# Altium PCB EncoderFin.PcbDoc
Units mil, origin at the board's own origin, x right, y up, seen from the top; angles counter-clockwise.
Board outline 1410 x 4085 mil, 2 copper layers (Top Layer, Bottom Layer); 80 components, 78 nets, 350 pads, 83 vias.
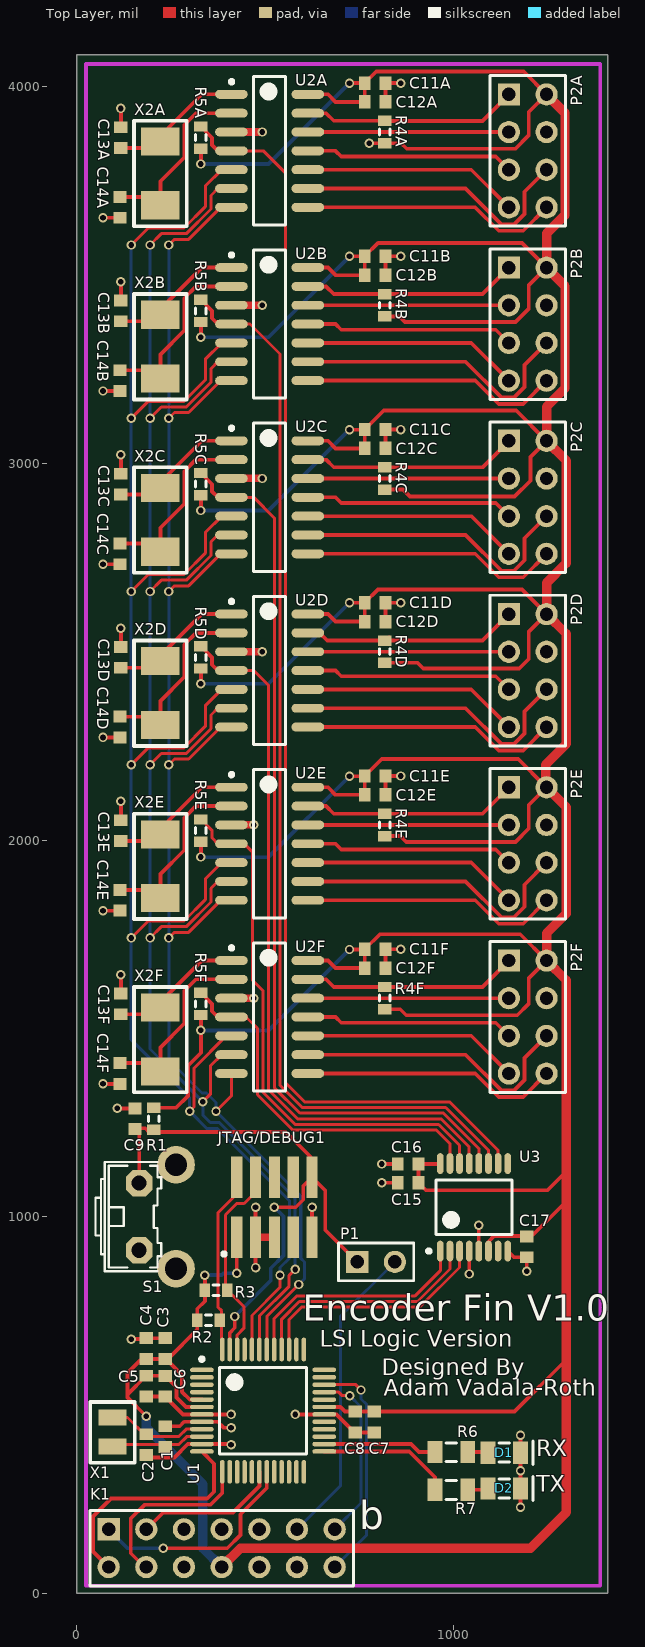
[diagram p0: Top Layer view]
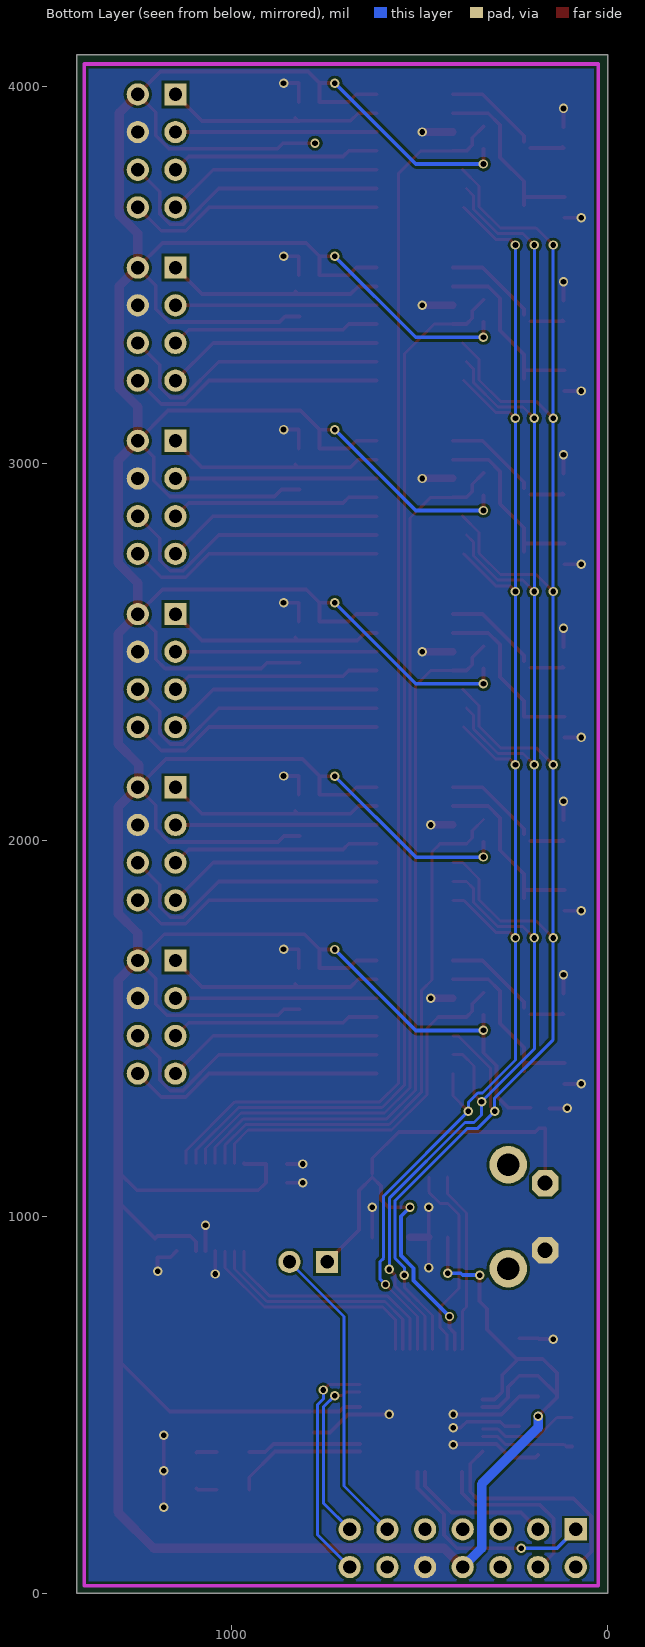
[diagram p1: Bottom Layer view, seen from below]

## Layer stack, top to bottom
Top Solder: solder mask 0.4, Solder Resist, Dk 3.5
Top Layer: signal copper 1.4
Dielectric 1: dielectric 12.6, FR-4, Dk 4.8
Bottom Layer: signal copper 1.4
Bottom Solder: solder mask 0.4, Solder Resist, Dk 3.5

## Board outline
0,0 0,4085 1410,4085 1410,0

## Design rules (kind name [scope] priority, off if disabled: settings)
Clearance [All] p1: gap=7
ComponentClearance [All] p1: gap=0 collisioncheckmode=3 verticalgap=10 showdistances=FALSE
FanoutControl Fanout_SOIC [(InComponent('U8') AND InComponent('U7'))] p3: bgadir=Out bgaviamode=Centered fanoutstyle=Staggered fanoutdirection=Alternating viagrid=1 // Fanout_SOIC (Default Rule)
FanoutControl Fanout_Small [All] p4: bgadir=Out bgaviamode=Centered fanoutstyle=Auto fanoutdirection=Alternating viagrid=1 // Fanout_Small (Default Rule)
HoleSize [All] p1: absolutevalues=TRUE maxlimit=120 minlimit=1 maxpercent=80.000 minpercent=20.000
MinimumSolderMaskSliver [All] p1 off: minsoldermaskwidth=10
PlaneConnect [All] p1: planeconnectstyle=Direct reliefexpansion=20 reliefentries=4 reliefconductorwidth=10 reliefairgap=10
PolygonConnect [All] p1: connectstyle=Direct reliefconductorwidth=45 reliefentries=4 polygonreliefangle="90 Angle" airgapwidth=10
RoutingVias [All] p1: holewidth=15 width=25 viastyle="Through Hole" minholewidth=15 minwidth=25 maxholewidth=28 maxwidth=50
SilkToSilkClearance [All] p1 off: silktosilkclearance=10
SilkToSolderMaskClearance SilkscreenOverComponentPads [IsPad] p1 off: minsilkscreentomaskgap=10 clearancetoexposedcopper=TRUE
SolderMaskExpansion [All] p1: expansion=4
UnpouredPolygon [All] p1: allowunpoured=FALSE
Width [All] p1: maxlimit=50 minlimit=7 preferedwidth=8
21 further rules are at their usual default settings.

## Classes and differential pairs
net class Q_SS[1..6]: Q_SS1 Q_SS2 Q_SS3 Q_SS4 Q_SS5 Q_SS6
channel class "Encoder Fin - Quadrature  Channel": U_EncoderFin-QuadratureChannel1 U_EncoderFin-QuadratureChannel2 U_EncoderFin-QuadratureChannel3 U_EncoderFin-QuadratureChannel4 U_EncoderFin-QuadratureChannel5 U_EncoderFin-QuadratureChannel6
component class U_EncoderFin-QuadratureChannel6: C11F C12F C13F C14F P2F R4F R5F U2F X2F
component class U_EncoderFin-QuadratureChannel5: C11E C12E C13E C14E P2E R4E R5E U2E X2E
component class U_EncoderFin-QuadratureChannel4: C11D C12D C13D C14D P2D R4D R5D U2D X2D
component class U_EncoderFin-QuadratureChannel3: C11C C12C C13C C14C P2C R4C R5C U2C X2C
component class U_EncoderFin-QuadratureChannel2: C11B C12B C13B C14B P2B R4B R5B U2B X2B
component class U_EncoderFin-QuadratureChannel1: C11A C12A C13A C14A P2A R4A R5A U2A X2A
component class "U_Encoder Fin - MCU": C1 C2 C3 C4 C5 C6 C7 C8 C9 D1 D2 JTAG/DEBUG1 P1 R1 R2 R3 R6 R7 S1 U1 X1
component class "U_Encoder Fin - Kinen Connector": K1
component class "Encoder Fin - System": C15 C16 C17 U3

## Components (designator, comment, footprint, x,y, rotation, side; value= is the part's Value field where it differs from the comment)
C1 "0603" 1608[0603] 235.29,416.1 r90 top
C2 "0603" 1608[0603] 185,395 r270 top
C3 "0603" 1608[0603] 235,650 r270 top
C4 "0603" 1608[0603] 185,650 r270 top
C5 "0603" 1608[0603] 185,550.08 r90 top
C6 "0603" 1608[0603] 235,550 r90 top
C7 "0603" 1608[0603] 790,455 r270 top
C8 "0603" 1608[0603] 740,455 r270 top
C9 "Cap Semi" 1608[0603] 155,1260 r270 top
C11A "0603" 1608[0603] 792.56,4009.41 r180 top (schematic designator C11)
C11B "0603" 1608[0603] 792.56,3549.53 r180 top (schematic designator C11)
C11C "0603" 1608[0603] 792.56,3089.65 r180 top (schematic designator C11)
C11D "0603" 1608[0603] 792.56,2629.77 r180 top (schematic designator C11)
C11E "0603" 1608[0603] 792.56,2169.88 r180 top (schematic designator C11)
C11F "0603" 1608[0603] 792.56,1710 r180 top (schematic designator C11)
C12A "0603" 1608[0603] 792.56,3959.41 r180 top (schematic designator C12)
C12B "0603" 1608[0603] 792.56,3499.53 r180 top (schematic designator C12)
C12C "0603" 1608[0603] 792.56,3039.65 r180 top (schematic designator C12)
C12D "0603" 1608[0603] 792.56,2579.77 r180 top (schematic designator C12)
C12E "0603" 1608[0603] 792.56,2119.88 r180 top (schematic designator C12)
C12F "0603" 1608[0603] 792.56,1660 r180 top (schematic designator C12)
C13A "0603" 1608[0603] 117.56,3864.53 r270 top (schematic designator C13)
C13B "0603" 1608[0603] 117.56,3404.65 r270 top (schematic designator C13)
C13C "0603" 1608[0603] 117.56,2944.77 r270 top (schematic designator C13)
C13D "0603" 1608[0603] 117.56,2484.88 r270 top (schematic designator C13)
C13E "0603" 1608[0603] 117.56,2025 r270 top (schematic designator C13)
C13F "0603" 1608[0603] 117.56,1565.12 r270 top (schematic designator C13)
C14A "0603" 1608[0603] 115.12,3679.53 r90 top (schematic designator C14)
C14B "0603" 1608[0603] 115.12,3219.65 r90 top (schematic designator C14)
C14C "0603" 1608[0603] 115.12,2759.77 r90 top (schematic designator C14)
C14D "0603" 1608[0603] 115.12,2299.88 r90 top (schematic designator C14)
C14E "0603" 1608[0603] 115.12,1840 r90 top (schematic designator C14)
C14F "0603" 1608[0603] 115.12,1380.12 r90 top (schematic designator C14)
C15 "0603" 1608[0603] 880,1090 r0 top
C16 "0603" 1608[0603] 880,1140 r0 top
C17 "0603" 1608[0603] 1195,920 r90 top
D1 "LED1" "SM 0805 polarized" 1215,330 r180 top
D2 "LED1" "SM 0805 polarized" 1215,235 r180 top
JTAG/DEBUG1 "ARM Cortex JTAG-DEBUG" FTSH-105-XX-X-DV 525,1025 r180 top
K1 "Smart Kinen" "Kinen Fin - Smart Device" 685,70 r90 top
P1 "Header 2" HDR1X2 745,880 r0 top
P2A "Header 4X2" HDR2X4 1147.56,3979.41 r270 top (schematic designator P2)
P2B "Header 4X2" HDR2X4 1147.56,3519.53 r270 top (schematic designator P2)
P2C "Header 4X2" HDR2X4 1147.56,3059.65 r270 top (schematic designator P2)
P2D "Header 4X2" HDR2X4 1147.56,2599.77 r270 top (schematic designator P2)
P2E "Header 4X2" HDR2X4 1147.56,2139.88 r270 top (schematic designator P2)
P2F "Header 4X2" HDR2X4 1147.56,1680 r270 top (schematic designator P2)
R1 "Res3" J1-0603 205,1260 r90 top
R2 "0603" J1-0603 350,725 r0 top
R3 "0603" J1-0603 370,805 r0 top
R4A "0603" J1-0603 817.56,3879.53 r270 top (schematic designator R4)
R4B "0603" J1-0603 817.56,3419.65 r270 top (schematic designator R4)
R4C "0603" J1-0603 817.56,2959.77 r270 top (schematic designator R4)
R4D "0603" J1-0603 817.56,2499.88 r270 top (schematic designator R4)
R4E "0603" J1-0603 817.56,2040 r270 top (schematic designator R4)
R4F "0603" J1-0603 817.56,1580.12 r270 top (schematic designator R4)
R5A "0603" J1-0603 330,3864.53 r90 top (schematic designator R5)
R5B "0603" J1-0603 330,3404.65 r90 top (schematic designator R5)
R5C "0603" J1-0603 330,2944.77 r90 top (schematic designator R5)
R5D "0603" J1-0603 330,2484.88 r90 top (schematic designator R5)
R5E "0603" J1-0603 330,2025 r90 top (schematic designator R5)
R5F "0603" J1-0603 330,1565.12 r90 top (schematic designator R5)
R6 "0805" "SM 0805 - gap trimmed" 995,375 r0 top
R7 "0805" "SM 0805 - gap trimmed" 995,275 r0 top
S1 "1571610-2" B3F-31XX 215,1000 r270 top
U1 "MKL05Z32VLF4" MKL05Z32VLF4 495,485 r0 top
U2A "LS7366R" SOIC127P630X175-14N 512.44,3829.53 r0 top (schematic designator U2)
U2B "LS7366R" SOIC127P630X175-14N 512.44,3369.65 r0 top (schematic designator U2)
U2C "LS7366R" SOIC127P630X175-14N 512.44,2909.77 r0 top (schematic designator U2)
U2D "LS7366R" SOIC127P630X175-14N 512.44,2449.88 r0 top (schematic designator U2)
U2E "LS7366R" SOIC127P630X175-14N 512.44,1990 r0 top (schematic designator U2)
U2F "LS7366R" SOIC127P630X175-14N 512.44,1530.12 r0 top (schematic designator U2)
U3 "74LV138" TSOP65P640X120-16N-74IC 1055,1025 r90 top
X1 "ABS07-32.768KHZ-T" ABS07-32.768KHZ-T 95,390 r90 top
X2A "XTAL" ABM7-10.0000MHZ-D2Y-T 222.56,3854.53 r270 top (schematic designator X2)
X2B "XTAL" ABM7-10.0000MHZ-D2Y-T 222.56,3394.65 r270 top (schematic designator X2)
X2C "XTAL" ABM7-10.0000MHZ-D2Y-T 222.56,2934.77 r270 top (schematic designator X2)
X2D "XTAL" ABM7-10.0000MHZ-D2Y-T 222.56,2474.88 r270 top (schematic designator X2)
X2E "XTAL" ABM7-10.0000MHZ-D2Y-T 222.56,2015 r270 top (schematic designator X2)
X2F "XTAL" ABM7-10.0000MHZ-D2Y-T 222.56,1555.12 r270 top (schematic designator X2)

## Footprints (in the part's own frame and the unit in brackets; to place one, negate y for a bottom-side part, rotate by r counter-clockwise, add the part's x,y. Pads: shape width x height; smd on the part's side, far side on the other; paste and mask are expansions set on the pad)
1608[0603] [mm] "Chip Capacitor, Body 1.6x0.8mm, IPC High Density"
  rect 0.8x0.9 smd: 1(-0.7,0) 2(0.7,0)
  body extent -0.87,-0.48 0.87,0.48, height 1.3
ABM7-10.0000MHZ-D2Y-T [mm] "Abracom 10MHZ SMD Crystal Oscillator"
  rect 1.9x2.6 smd: 1(0,0) 2(4.3,0)
  silkscreen extent -1.4,-1.78 5.71,1.78
ABS07-32.768KHZ-T [mm] "ABS07-32.768KHZ-T Crystal Oscillator"
  rect 1.1x1.9 smd: 1(0,0) 2(1.95,0)
  silkscreen extent -1.1,-1.5 3,1.5
B3F-31XX [mil]
  oct 70x70 hole 40: 1(-89,-49) 2(89,-49)
  round 100 hole 59: 3(-138,49) 4(138,49)
  silkscreen extent -145,-165 145,10, body extent -165,-200 165,109, height 303
FTSH-105-XX-X-DV [mm] "1.27mm pitch, 10 pin, terminal strip; vertical, SMT"
  rect 0.75x2.8 smd mask+0: 1(2.54,2.03) 2(2.54,-2.03) 3(1.27,2.03) 4(1.27,-2.03) 5(0,2.03) 6(0,-2.03) 7(-1.27,2.03) 8(-1.27,-2.03) 9(-2.54,2.03) 10(-2.54,-2.03)
  silkscreen extent 3.27,3.03 3.52,3.27
HDR1X2 [mm] "Connector; Header; 2 Position"
  rect 1.5x1.5 hole 0.9: 1(0,0)
  round 1.5 hole 0.9: 2(2.54,0)
  silkscreen extent -1.27,-1.27 3.81,1.27
HDR2X4 [mm] "Connector; Header; 4x2 Position"
  rect 1.5x1.5 hole 0.9: 1(0,0)
  round 1.5 hole 0.9: 2(0,2.54) 3(2.54,0) 4(2.54,2.54) 5(5.08,0) 6(5.08,2.54) 7(7.62,0) 8(7.62,2.54)
  silkscreen extent -1.27,-1.27 8.89,3.81
J1-0603 [mm] "Chip Resistor, Body 1.6x0.8mm, IPC High Density"
  rect 0.7x0.9 smd: 1(-0.75,0) 2(0.75,0)
  silkscreen extent -0.2,-0.35 0.2,0.35, body extent -0.85,-0.48 0.85,0.48, height 0.9
"Kinen Fin - Smart Device" [mm]
  rect 1.5x1.5 hole 0.9: 1(2.54,15.24)
  round 1.5 hole 0.9: 2(0,15.24) 3(2.54,12.7) 4(0,12.7) 5(2.54,10.16) 6(0,10.16) 7(2.54,7.62) 8(0,7.62) 9(2.54,5.08) 10(0,5.08) 11(2.54,2.54) 12(0,2.54) 13(2.54,0) 14(0,0)
  silkscreen extent -1.27,-1.27 3.81,16.51
MKL05Z32VLF4 [mm] "TSQFP, 48-Leads, Body 7.00x7.00mm, Pitch 0.50mm, IPC Medium Density"
  oval 1.6x0.3 smd: 1(-4.125,2.75) 2(-4.125,2.25) 3(-4.125,1.75) 4(-4.125,1.25) 5(-4.125,0.75) 6(-4.125,0.25) 7(-4.125,-0.25) 8(-4.125,-0.75) 9(-4.125,-1.25) 10(-4.125,-1.75) 11(-4.125,-2.25) 12(-4.125,-2.75) 25(4.125,-2.75) 26(4.125,-2.25) 27(4.125,-1.75) 28(4.125,-1.25) 29(4.125,-0.75) 30(4.125,-0.25) 31(4.125,0.25) 32(4.125,0.75) 33(4.125,1.25) 34(4.125,1.75) 35(4.125,2.25) 36(4.125,2.75)
  oval 0.3x1.6 smd: 13(-2.75,-4.125) 14(-2.25,-4.125) 15(-1.75,-4.125) 16(-1.25,-4.125) 17(-0.75,-4.125) 18(-0.25,-4.125) 19(0.25,-4.125) 20(0.75,-4.125) 21(1.25,-4.125) 22(1.75,-4.125) 23(2.25,-4.125) 24(2.75,-4.125) 37(2.75,4.125) 38(2.25,4.125) 39(1.75,4.125) 40(1.25,4.125) 41(0.75,4.125) 42(0.25,4.125) 43(-0.25,4.125) 44(-0.75,4.125) 45(-1.25,4.125) 46(-1.75,4.125) 47(-2.25,4.125) 48(-2.75,4.125)
  silkscreen extent -4.25,-2.93 2.93,3.6, body extent -3.5,-3.5 3.5,3.5, height 1.6
"SM 0805 - gap trimmed" [mm]
  rect 1x1.5 smd: 1(-1.1,0) 2(1.1,0)
  silkscreen extent -0.36,-0.64 0.35,0.63
"SM 0805 polarized" [mm]
  rect 1x1.5 smd: 1(0.93,-1.105) 2(3.13,-1.105)
  silkscreen extent 0.1,-1.9 2.38,-0.3
SOIC127P630X175-14N [mm] "SOIC, 14-Leads, Body 10.0x4.0mm (max), Pitch 1.27mm, IPC Medium Density"
  oval 2.2x0.6 smd: 1(-2.575,3.81) 2(-2.575,2.54) 3(-2.575,1.27) 4(-2.575,0) 5(-2.575,-1.27) 6(-2.575,-2.54) 7(-2.575,-3.81) 8(2.575,-3.81) 9(2.575,-2.54) 10(2.575,-1.27) 11(2.575,0) 12(2.575,1.27) 13(2.575,2.54) 14(2.575,3.81)
  silkscreen extent -2.7,-5 1.07,5, body extent -2,-5 2,5, height 1.75
TSOP65P640X120-16N-74IC [mm] "TSOP, 16-Leads, Body 5.00x4.40mm, Pitch 0.65mm, IPC Medium Density"
  oval 1.4x0.45 smd: 1(-2.95,2.275) 2(-2.95,1.625) 3(-2.95,0.975) 4(-2.95,0.325) 5(-2.95,-0.325) 6(-2.95,-0.975) 7(-2.95,-1.625) 8(-2.95,-2.275) 9(2.95,-2.275) 10(2.95,-1.625) 11(2.95,-0.975) 12(2.95,-0.325) 13(2.95,0.325) 14(2.95,0.975) 15(2.95,1.625) 16(2.95,2.275)
  silkscreen extent -3.07,-2.55 1.85,3.17, body extent -2.25,-2.55 2.25,2.55, height 1.2

## Part data
C1 C2 C3 C4 C5 C6 C7 C8 C11A C11B C11C C11D C11E C11F C12A C12B C12C C12D C12E C12F C13A C13B C13C C13D C13E C13F C14A C14B C14C C14D C14E C14F C15 C16 C17: library part "Cap Semi", "Capacitor (Semiconductor SIM Model)"
C9: "Capacitor (Semiconductor SIM Model)"
D1 D2: "Typical RED GaAs LED"
JTAG/DEBUG1: library part "ARM Cortex JTAG-DEBUG Header"
K1: library part "Kinen Device NEW Smart"
P1: "Header, 2-Pin"
P2A P2B P2C P2D P2E P2F: "Header, 4-Pin, Dual row"
R1: "Resistor"
R2 R3 R4A R4B R4C R4D R4E R4F R5A R5B R5C R5D R5E R5F R6 R7: library part Res3, "Resistor"
S1: library part 1571610-2_1, "SWTCH Momentary Washable"
U1: "ARM Cortex M0+"
U3: library part "74LV138 - 3 to 8 Decoder NXP 3.3v/5v", "74LV138 - 3 to 8 Decoder NXP 3.3v/5v"
X1: "ABS07-32.768KHZ-T RTC Crystal Oscillator"
X2A X2B X2C X2D X2E X2F: "Crystal Oscillator"

## Via types
v1: diameter 25, hole 15, Top Layer to Bottom Layer, 83 vias

## Nets (pads, with @x,y where several pads share a name; then routed paths per layer and width w, separated by ;. In a path a pad name is that pad's centre, name@x,y a point inside that pad or via, vN(x,y) a via of type N, cw(c..) or ccw(c..) an arc to the next point about the centre after c; other vN are vias at no path point)
3.3VCC: C3.2 C4.2 C5.2 C6.2 C7.1 C8.1 C11A.2 C11B.2 C11C.2 C11D.2 C11E.2 C11F.2 C12A.2 C12B.2 C12C.2 C12D.2 C12E.2 C12F.2 C15.2 C16.2 C17.2 JTAG/DEBUG1.1 K1.8 P2A.2 P2B.2 P2C.2 P2D.2 P2E.2 P2F.2 R1.2 R2.1 R3.1 R4A.2 R4B.2 R4C.2 R4D.2 R4E.2 R4F.2 R5A.1 R5B.1 R5C.1 R5D.1 R5E.1 R5F.1 U1.5 U1.6 U1.31 U2A.14 U2B.14 U2C.14 U2D.14 U2E.14 U2F.14 U3.6 U3.16 | length 19440.7
  Top Layer w10: v1(185,470) 135,520 135,527.64 ; R1.2 264.53,1289.53 295.5,1320.5 295.5,1400.94 330,1435.44 v1(330,1495.12) R5F.1 ; v1(330,1955) R5E.1 ; v1(330,2414.88) R5D.1 ; v1(330,2874.77) R5C.1 ; v1(330,3334.65) R5B.1 ; v1(330,3794.53) R5A.1 ; U1.6 290.16,494.84 265,520 265,547.56 C6.2 234.92,577.64 C5.2 135,527.64 ; U1.5 300.47,514.53 280,535 280,580 C3.2@237.56,622.44 ; v1(340,845) 340.47,844.53 R3.1 340.47,775.47 320.47,755.47 320.47,700.47 242.44,622.44 C3.2@237.56,622.44 ; v1(425,850) JTAG/DEBUG1.1 ; U2F.14 667.44,1680.12 687.56,1660 C12F.2 C11F.2 805,1750 1177.56,1750 P2F.2 1200,1632.44 1200,1565 1170,1535 875,1535 859.41,1550.59 R4F.2 ; U2E.14 667.44,2140 687.56,2119.88 C12E.2 C11E.2 810.12,2215 1172.44,2215 1245,2142.44 P2E.2 1200,2092.32 1200,2030 1165,1995 875,1995 859.53,2010.47 R4E.2 ; U2D.14 667.44,2599.88 687.56,2579.77 C12D.2 C11D.2 ; U2C.14 667.44,3059.77 687.56,3039.65 C12C.2 C11C.2 815.35,3140 1167.21,3140 P2C.2 1205,3017.09 1205,2953.97 1162.68,2911.65 885,2911.65 866.41,2930.24 R4C.2 ; U2B.14 667.44,3519.65 687.56,3499.53 C12B.2 C11B.2 800.47,3585 1182.09,3585 P2B.2 1200,3471.97 1200,3410 1165,3375 871.53,3375 856.41,3390.12 R4B.2 ; U2A.14 667.44,3979.53 687.56,3959.41 C12A.2 C11A.2 ; U1.31 700.16,494.84 712.44,482.56 C8.1 C7.1@780,482.56 ; v1(724.53,1709.41) C11F.2@765,1709.41 ; v1(724.53,2169.41) C11E.2@765,2169.41 ; v1(724.53,2629.77) C11D.2 ; v1(724.53,3089.41) C11C.2@765,3089.41 ; v1(724.53,3549.41) C11B.2@765,3549.41 ; v1(724.53,4009.41) C11A.2 ; v1(777.09,3850) R4A.2 861.41,3850 876.41,3835 1165,3835 1200,3870 1200,3931.85 P2A.2 1186.97,4040 795.59,4040 C11A.2 ; C7.1 1162.56,482.56 1300,620 ; R4D.2 904.65,2470.36 920,2455 1175,2455 1200,2480 1200,2552.21 P2D.2 1182.32,2665 800.24,2665 C11D.2 ; U3.16 964.29,1140 C16.2 C15.2 927.56,1070 1250,1070 1300,1120 ; U3.6 1093.39,933.39 1108.42,948.42 1195,948.42 C17.2 ; C17.2@1201.71,941.71 1300,1040 ; 135,527.64 135,585 172.44,622.44 C4.2 C3.2 C3.2@237.56,622.44
  Top Layer w25: K1.8 435,120 1205,120 1300,215 1300,620 1300,1040 1300,1120 1300,1627.56 P2F.2 1247.56,1752.44 1300,1804.88 1300,2087.44 P2E.2 ; P2E.2@1245,2142.44 1245,2200 1300,2255 1300,2547.32 P2D.2 1247.56,2682.56 1300,2735 1300,3007.21 P2C.2 1247.56,3150.19 1296.59,3199.22 1296.59,3470.5 P2B.2 1247.56,3610.08 1296.59,3659.1 1296.59,3930.38 P2A.2
  Bottom Layer w10: v1@330,1494.53 509.65,1494.53 v1(724.53,1709.41) ; v1@330,1954.53 509.65,1954.53 v1(724.53,2169.41) ; v1(330,2414.88) 509.65,2414.88 v1(724.53,2629.77) ; v1@330,2874.53 509.65,2874.53 v1(724.53,3089.41) ; v1@330,3334.53 509.65,3334.53 v1(724.53,3549.41) ; v1(330,3794.53) 509.65,3794.53 v1(724.53,4009.41) ; v1(340,845) 385,845 390,850 v1(425,850)
  Bottom Layer w25: v1(185,470) 185,440 335,290 335,120 K1.8
B_DECO: U1.40 U3.2 | length 630.3
  Top Layer w8: U1.40 544.21,728 591.21,775 905,775 991.02,861.02 U3.2
C_DECO: U1.39 U3.3 | length 632.8
  Top Layer w8: U1.39 563.9,726.47 597.43,760 911.21,760 1016.61,865.4 U3.3
EXTAL0: C2.1 U1.9 X1.2 | length 266.1
  Top Layer w8: X1.2 135.14,466.77 185,416.91 271.91,416.91 290.79,435.79 U1.9
GND: C1.2 C2.2 C3.1 C4.1 C5.1 C6.1 C7.2 C8.2 C9.1 C11A.1 C11B.1 C11C.1 C11D.1 C11E.1 C11F.1 C12A.1 C12B.1 C12C.1 C12D.1 C12E.1 C12F.1 C13A.1 C13B.1 C13C.1 C13D.1 C13E.1 C13F.1 C14A.1 C14B.1 C14C.1 C14D.1 C14E.1 C14F.1 C15.1 C16.1 C17.1 D1.1 D2.1 JTAG/DEBUG1.3 JTAG/DEBUG1.5 JTAG/DEBUG1.9 K1.10 P2A.4 P2B.4 P2C.4 P2D.4 P2E.4 P2F.4 S1.2 U1.7 U1.8 U1.11 U1.30 U2A.3 U2B.3 U2C.3 U2D.3 U2E.3 U2F.3 U3.4 U3.5 U3.8 | length 3379.7
  Top Layer w10: v1(70,1352.56) C14F.1 ; v1(70,1812.44) C14E.1 ; v1(70,2272.32) C14D.1 ; v1(70,2732.21) C14C.1 ; v1(70,3192.09) C14B.1 ; v1(70,3651.97) C14A.1 ; v1(107.44,1287.56) C9.1 ; C13F.1 v1(117.56,1642.68) ; C13E.1 v1(117.56,2102.56) ; C13D.1 v1(117.56,2562.44) ; C13C.1 v1(117.56,3022.32) ; C13B.1 v1(117.56,3482.21) ; C13A.1 v1(117.56,3942.09) ; v1(145,675) 182.44,675 C4.1 C3.1 ; C2.2 191.65,360.8 259.64,360.8 295.26,396.42 U1.11 408.58,396.42 v1(410,395) ; C5.1 234.92,522.52 C6.1 282.28,475.16 U1.7 409.84,475.16 v1(410,475) ; C1.2 273.66,443.66 285.47,455.47 U1.8 374.53,455.47 390,440 v1(410,440) ; v1(475,865) JTAG/DEBUG1.3 v1(475,1025) ; v1(580,475) 580.16,475.16 U1.30 689.84,475.16 737.56,427.44 C7.2@780,427.44 ; JTAG/DEBUG1.9 v1(625,1025) ; v1(810,1090) C15.1 ; v1(810,1140) C16.1 ; C12F.1 C11F.1 v1(860.59,1710) ; C12E.1 C11E.1 v1(860.59,2169.88) ; C12D.1 C11D.1 v1(860.59,2629.77) ; C12C.1 C11C.1 v1(860.59,3089.65) ; C12B.1 C11B.1 v1(860.59,3549.53) ; C12A.1 C11A.1 v1(860.59,4009.41) ; v1(1042.21,847.8) U3.4 ; U3.5 v1(1067.8,977.21) ; U3.8 1160.98,892.44 C17.1 v1(1195,855) ; v1(1178.39,228.39) D2.1 v1(1178.39,326) D1.1 v1(1178.39,420)
  Top Layer w20: U2F.3 411.18,1580 v1(470,1580) ; U2E.3 v1(470,2040) ; U2D.3 v1(492.44,2499.88) ; U2C.3 v1(492.44,2959.77) ; U2B.3 v1(492.44,3419.65) ; U2A.3 v1(492.44,3879.53) ; JTAG/DEBUG1.3 JTAG/DEBUG1.5
KSPI_MISO: K1.4 U1.13 | length 485.1
  Top Layer w10: K1.4@190,60 143.47,106.53 143.47,198.47 180,235 355,235 386.73,266.73 U1.13
KSPI_MOSI: K1.2 U1.12 | length 620.5
  Top Layer w10: K1.2 43.47,111.53 43.47,204.5 90.97,252 347,252 365,270 365,344.33 U1.12
KSPI_SCLK: K1.3 U1.18 | length 385.3
  Top Layer w10: K1.3 230,215 415,215 485.16,285.16 U1.18
KSPI_SS: K1.1 U1.19 | length 581.7
  Top Layer w10: v1(230,120) 400,120 435,155 435,210 504.84,279.84 U1.19
  Bottom Layer w10: K1.1 135,120 v1(230,120)
NetC13A_2: C13A.2 U2A.1 X2A.1 | length 340.1
  Top Layer w10: C13A.2@120.12,3839.53 C13A.2 X2A.1@205,3836.97 ; X2A.1 222.56,3869.53 332.56,3979.53 U2A.1
NetC13B_2: C13B.2 U2B.1 X2B.1 | length 340.1
  Top Layer w10: C13B.2@120.12,3379.65 C13B.2 X2B.1@205,3377.09 ; X2B.1 222.56,3409.65 332.56,3519.65 U2B.1
NetC13C_2: C13C.2 U2C.1 X2C.1 | length 340.1
  Top Layer w10: C13C.2@120.12,2919.77 C13C.2 X2C.1@205,2917.21 ; X2C.1 222.56,2949.77 332.56,3059.77 U2C.1
NetC13D_2: C13D.2 U2D.1 X2D.1 | length 340.1
  Top Layer w10: C13D.2@120.12,2459.88 C13D.2 X2D.1@205,2457.32 ; X2D.1 222.56,2489.88 332.56,2599.88 U2D.1
NetC13E_2: C13E.2 U2E.1 X2E.1 | length 340.1
  Top Layer w10: C13E.2@120.12,2000 C13E.2 X2E.1@205,1997.44 ; X2E.1 222.56,2030 332.56,2140 U2E.1
NetC13F_2: C13F.2 U2F.1 X2F.1 | length 340.1
  Top Layer w10: C13F.2@120.12,1540.12 C13F.2 X2F.1@205,1537.56 ; X2F.1 222.56,1570.12 332.56,1680.12 U2F.1
NetC14A_2: C14A.2 U2A.2 X2A.2 | length 484.9
  Top Layer w10: C14A.2 X2A.2@222.56,3707.09 ; X2A.2 X2A.2@222.56,3707.09 ; U2A.2 317.01,3929.53 285.74,3898.26 285.74,3812.16 222.56,3748.98 X2A.2@222.56,3707.09
NetC14B_2: C14B.2 U2B.2 X2B.2 | length 484.9
  Top Layer w10: C14B.2 X2B.2@222.56,3247.21 ; X2B.2 X2B.2@222.56,3247.21 ; U2B.2 317.01,3469.65 285.74,3438.38 285.74,3352.28 222.56,3289.09 X2B.2@222.56,3247.21
NetC14C_2: C14C.2 U2C.2 X2C.2 | length 484.9
  Top Layer w10: C14C.2 X2C.2@222.56,2787.32 ; X2C.2 X2C.2@222.56,2787.32 ; U2C.2 317.01,3009.77 285.74,2978.5 285.74,2892.39 222.56,2829.21 X2C.2@222.56,2787.32
NetC14D_2: C14D.2 U2D.2 X2D.2 | length 463.1
  Top Layer w10: C14D.2 222.56,2327.44 222.56,2369.33 285.74,2432.51 285.74,2518.62 317.01,2549.88 U2D.2
NetC14E_2: C14E.2 U2E.2 X2E.2 | length 484.9
  Top Layer w10: C14E.2 X2E.2@222.56,1867.56 ; X2E.2 X2E.2@222.56,1867.56 ; U2E.2 317.01,2090 285.74,2058.74 285.74,1972.63 222.56,1909.45 X2E.2@222.56,1867.56
NetC14F_2: C14F.2 U2F.2 X2F.2 | length 484.9
  Top Layer w10: C14F.2 X2F.2@222.56,1407.68 ; X2F.2 X2F.2@222.56,1407.68 ; U2F.2 317.01,1630.12 285.74,1598.85 285.74,1512.75 222.56,1449.57 X2F.2@222.56,1407.68
NetD1_2: D1.2 R6.2 | length 54.1
  Top Layer w10: R6.2 1090.28,375 D1.2
NetD2_2: D2.2 R7.2 | length 54.9
  Top Layer w10: R7.2 1088.27,275 D2.2
NetK1_11: K1.11 P1.2 | length 817.7
  Bottom Layer w8: K1.11 700,285 700,735 P1.2
NetK1_13: K1.13 U1.33 | length 467.8
  Top Layer w8: U1.33 695.79,534.21 705,525 v1(725,525)
  Bottom Layer w8: K1.13 755,240 755,495 v1(725,525)
NetK1_14: K1.14 U1.34 | length 614.8
  Top Layer w8: U1.34 741.1,553.9 v1(755,540)
  Bottom Layer w8: K1.14 770,155 770,501.21 755,516.21 v1(755,540)
NetP2A_1: P2A.1 R4A.1 U2A.13 | length 586.7
  Top Layer w10: U2A.13 662.44,3929.53 682.56,3909.41 822.32,3909.41 R4A.1@829.88,3916.97 ; R4A.1 1077.2,3909.06 P2A.1
NetP2A_3: P2A.3 U2A.12 | length 533.8
  Top Layer w10: U2A.12 1147.44,3879.53 P2A.3
NetP2A_5: P2A.5 U2A.11 | length 554.5
  Top Layer w10: U2A.11 687.44,3829.53 702.56,3814.41 1112.56,3814.41 P2A.5
NetP2A_6: P2A.6 U2A.9 | length 767.6
  Top Layer w10: U2A.9 1032.44,3729.53 1127.56,3634.41 1161.29,3634.41 1189.09,3662.21 1189.09,3720.94 P2A.6
NetP2A_7: P2A.7 U2A.10 | length 575.2
  Top Layer w10: U2A.10 1047.44,3779.53 P2A.7
NetP2A_8: P2A.8 U2A.8 | length 685.2
  Top Layer w10: U2A.8 1058.4,3679.53 1120.52,3617.41 1185.56,3617.41 P2A.8
NetP2B_1: P2B.1 R4B.1 U2B.13 | length 586.7
  Top Layer w10: U2B.13 662.44,3469.65 682.56,3449.53 822.32,3449.53 R4B.1@829.88,3457.09 ; R4B.1 1077.2,3449.18 P2B.1
NetP2B_3: P2B.3 U2B.12 | length 533.8
  Top Layer w10: U2B.12 1147.44,3419.65 P2B.3
NetP2B_5: P2B.5 U2B.11 | length 554.5
  Top Layer w10: U2B.11 687.44,3369.65 702.56,3354.53 1112.56,3354.53 P2B.5
NetP2B_6: P2B.6 U2B.9 | length 767.6
  Top Layer w10: U2B.9 1032.44,3269.65 1127.56,3174.53 1161.29,3174.53 1189.09,3202.33 1189.09,3261.06 P2B.6
NetP2B_7: P2B.7 U2B.10 | length 575.2
  Top Layer w10: U2B.10 1047.44,3319.65 P2B.7
NetP2B_8: P2B.8 U2B.8 | length 685.2
  Top Layer w10: U2B.8 1058.4,3219.65 1120.52,3157.53 1185.56,3157.53 P2B.8
NetP2C_1: P2C.1 R4C.1 U2C.13 | length 586.7
  Top Layer w10: U2C.13 662.44,3009.77 682.56,2989.65 822.32,2989.65 R4C.1@829.88,2997.21 ; R4C.1 1077.2,2989.29 P2C.1
NetP2C_3: P2C.3 U2C.12 | length 533.8
  Top Layer w10: U2C.12 1147.44,2959.77 P2C.3
NetP2C_5: P2C.5 U2C.11 | length 554.5
  Top Layer w10: U2C.11 687.44,2909.77 702.56,2894.65 1112.56,2894.65 P2C.5
NetP2C_6: P2C.6 U2C.9 | length 767.6
  Top Layer w10: U2C.9 1032.44,2809.77 1127.56,2714.65 1161.29,2714.65 1189.09,2742.45 1189.09,2801.18 P2C.6
NetP2C_7: P2C.7 U2C.10 | length 575.2
  Top Layer w10: U2C.10 1047.44,2859.77 P2C.7
NetP2C_8: P2C.8 U2C.8 | length 685.2
  Top Layer w10: U2C.8 1058.4,2759.77 1120.52,2697.65 1185.56,2697.65 P2C.8
NetP2D_1: P2D.1 R4D.1 U2D.13 | length 586.7
  Top Layer w10: U2D.13 645.12,2549.88 665.23,2529.77 822.32,2529.77 R4D.1@829.88,2537.32 ; R4D.1 1077.2,2529.41 P2D.1
NetP2D_3: P2D.3 U2D.12 | length 533.8
  Top Layer w10: U2D.12 1147.44,2499.88 P2D.3
NetP2D_5: P2D.5 U2D.11 | length 554.5
  Top Layer w10: U2D.11 687.44,2449.88 702.56,2434.77 1112.56,2434.77 P2D.5
NetP2D_6: P2D.6 U2D.9 | length 767.6
  Top Layer w10: U2D.9 1032.44,2349.88 1127.56,2254.77 1161.29,2254.77 1189.09,2282.56 1189.09,2341.29 P2D.6
NetP2D_7: P2D.7 U2D.10 | length 575.2
  Top Layer w10: U2D.10 1047.44,2399.88 P2D.7
NetP2D_8: P2D.8 U2D.8 | length 685.2
  Top Layer w10: U2D.8 1058.4,2299.88 1120.52,2237.77 1185.56,2237.77 P2D.8
NetP2E_1: P2E.1 R4E.1 U2E.13 | length 586.7
  Top Layer w10: U2E.13 662.44,2090 682.56,2069.88 822.32,2069.88 R4E.1@829.88,2077.44 ; R4E.1 1077.2,2069.53 P2E.1
NetP2E_3: P2E.3 U2E.12 | length 533.8
  Top Layer w10: U2E.12 1147.44,2040 P2E.3
NetP2E_5: P2E.5 U2E.11 | length 554.5
  Top Layer w10: U2E.11 687.44,1990 702.56,1974.88 1112.56,1974.88 P2E.5
NetP2E_6: P2E.6 U2E.9 | length 767.6
  Top Layer w10: U2E.9 1032.44,1890 1127.56,1794.88 1161.29,1794.88 1189.09,1822.68 1189.09,1881.41 P2E.6
NetP2E_7: P2E.7 U2E.10 | length 575.2
  Top Layer w10: U2E.10 1047.44,1940 P2E.7
NetP2E_8: P2E.8 U2E.8 | length 685.2
  Top Layer w10: U2E.8 1058.4,1840 1120.52,1777.88 1185.56,1777.88 P2E.8
NetP2F_1: P2F.1 R4F.1 U2F.13 | length 586.7
  Top Layer w10: U2F.13 662.44,1630.12 682.56,1610 822.32,1610 R4F.1@829.88,1617.56 ; R4F.1 1077.2,1609.65 P2F.1
NetP2F_3: P2F.3 U2F.12 | length 533.8
  Top Layer w10: U2F.12 1147.44,1580.12 P2F.3
NetP2F_5: P2F.5 U2F.11 | length 554.5
  Top Layer w10: U2F.11 687.44,1530.12 702.56,1515 1112.56,1515 P2F.5
NetP2F_6: P2F.6 U2F.9 | length 767.6
  Top Layer w10: U2F.9 1032.44,1430.12 1127.56,1335 1161.29,1335 1189.09,1362.8 1189.09,1421.53 P2F.6
NetP2F_7: P2F.7 U2F.10 | length 575.2
  Top Layer w10: U2F.10 1047.44,1480.12 P2F.7
NetP2F_8: P2F.8 U2F.8 | length 685.2
  Top Layer w10: U2F.8 1058.4,1380.12 1120.52,1318 1185.56,1318 P2F.8
NetR6_1: R6.1 U1.26 | length 303.2
  Top Layer w10: U1.26 887.62,396.42 909.04,375 R6.1
NetR7_1: R7.1 U1.25 | length 355.9
  Top Layer w10: U1.25 883.27,376.73 951.69,308.31 R7.1
NetU1_42: U1.42 U2A.7 U2B.7 U2C.7 U2D.7 U2E.7 U2F.7 | length 4169.8
  Top Layer w8: v1(245,1740) 260,1755 297.43,1755 382.43,1840 U2E.7 ; v1(245,2199.88) 260,2214.88 297.43,2214.88 U2D.7@382.43,2299.88 ; v1(245,2659.77) 260,2674.77 297.43,2674.77 U2C.7@382.43,2759.77 ; v1(245,3119.65) 260,3134.65 297.43,3134.65 U2B.7@382.43,3219.65 ; v1(245,3579.53) 260,3594.53 297.43,3594.53 U2A.7@382.43,3679.53 ; v1(370,1280) 411.06,1321.06 U2F.7 ; U1.42 504.84,734.84 v1(590,820)
  Bottom Layer w8: v1(245,3579.53) v1(245,3119.65) v1(245,2659.77) v1(245,2199.88) v1(245,1740) 245,1416.21 332.71,1328.5 344.73,1328.5 370,1303.23 v1(370,1280) 595,1055 595,890 605,880 605,835 v1(590,820)
NetU1_43: U1.43 U2A.6 U2B.6 U2C.6 U2D.6 U2E.6 U2F.6 | length 4669.4
  Top Layer w8: v1(195,1740) 225,1770 291.21,1770 356.76,1835.54 356.76,1871.76 375,1890 U2E.6 ; v1(195,2199.88) 225,2229.88 291.21,2229.88 356.76,2295.43 356.76,2331.64 U2D.6@375,2349.88 ; v1(195,2659.77) 225,2689.77 291.21,2689.77 356.76,2755.31 356.76,2791.52 U2C.6@375,2809.77 ; v1(195,3119.65) 225,3149.65 291.21,3149.65 356.76,3215.19 356.76,3251.4 U2B.6@375,3269.65 ; v1(195,3579.53) 225,3609.53 291.21,3609.53 356.76,3675.07 356.76,3711.29 U2A.6@375,3729.53 ; v1(335,1305) 355,1325 355,1400 385.12,1430.12 U2F.6 ; U1.43 485.16,736.37 564.39,815.61 564.39,844.39 v1(580,860)
  Bottom Layer w8: v1(195,3579.53) v1(195,3119.65) v1(195,2659.77) v1(195,2199.88) v1(195,1740) 195,1445 v1(335,1305) 335,1270 355,1250 378.79,1250 580,1048.79 v1(580,860)
NetU1_44: U1.44 U2A.5 U2B.5 U2C.5 U2D.5 U2E.5 U2F.5 | length 5219
  Top Layer w8: v1(145,1740) 190,1785 285,1785 341.76,1841.76 341.76,1896.76 385,1940 U2E.5 ; v1(145,2199.88) 190,2244.88 285,2244.88 341.76,2301.64 341.76,2356.64 U2D.5@385,2399.88 ; v1(145,2659.77) 190,2704.77 285,2704.77 341.76,2761.52 341.76,2816.52 U2C.5@385,2859.77 ; v1(145,3119.65) 190,3164.65 285,3164.65 341.76,3221.4 341.76,3276.4 U2B.5@385,3319.65 ; v1(145,3579.53) 190,3624.53 285,3624.53 341.76,3681.29 341.76,3736.29 U2A.5@385,3779.53 ; v1(300,1280) 311.5,1291.5 311.5,1394.31 397.31,1480.12 U2F.5 ; U1.44 465.47,737.9 540,812.43 v1(540,845)
  Bottom Layer w8: v1(145,3579.53) v1(145,3119.65) v1(145,2659.77) v1(145,2199.88) v1(145,1740) 145,1470 300,1315 v1(300,1280) 346.21,1233.79 373.79,1233.79 565,1042.57 565,890 540,865 v1(540,845)
Q_SS1: R5A.2 U2A.4 U3.10 | length 3375.8
  Top Layer w8: U2A.4 495.47,3829.53 555,3770 555,1355 605,1305 990,1305 1118.98,1176.02 U3.10
  Top Layer w10: R5A.2 359.72,3864.34 359.72,3844.81 375,3829.53 U2A.4
Q_SS2: R5B.2 U2B.4 U3.11 | length 2882.5
  Top Layer w8: U2B.4 460.35,3369.65 540,3290 540,1348.79 598.79,1290 979.85,1290 1093.39,1176.47 U3.11
  Top Layer w10: R5B.2 359.72,3404.46 359.72,3384.93 375,3369.65 U2B.4
Q_SS3: R5C.2 U2C.4 U3.12 | length 2417.8
  Top Layer w8: U2C.4 470.24,2909.77 525,2855 525,1342.57 592.57,1275 973.64,1275 1067.8,1180.84 U3.12
  Top Layer w10: R5C.2 359.72,2944.58 359.72,2925.05 375,2909.77 U2C.4
Q_SS4: R5D.2 U2D.4 U3.13 | length 1947.2
  Top Layer w8: U2D.4 470.12,2449.88 510,2410 510,1336.36 586.36,1260 967.43,1260 1042.21,1185.22 U3.13
  Top Layer w10: R5D.2 359.72,2484.69 359.72,2465.17 375,2449.88 U2D.4
Q_SS5: R5E.2 U2E.4 U3.14 | length 1462
  Top Layer w8: R5E.2 359.72,2024.81 359.72,2005.28 U2E.4@375,1990 ; U2E.4@445,1990 466.37,1968.63 466.37,1628.63 495,1600 495,1330.15 580.15,1245 961.21,1245 1016.61,1189.6 U3.14
  Top Layer w10: U2E.4@375,1990 U2E.4 U2E.4@445,1990
Q_SS6: R5F.2 U2F.4 U3.15 | length 994.4
  Top Layer w8: U2F.4@449.88,1530.12 480,1500 480,1323.93 573.93,1230 955,1230 991.02,1193.98 U3.15
  Top Layer w10: R5F.2 359.72,1564.93 359.72,1545.4 375,1530.12 U2F.4 U2F.4@449.88,1530.12
RESET: C9.2 JTAG/DEBUG1.10 P1.1 R1.1 S1.1 U1.47 | length 1554.1
  Top Layer w10: S1.1 166,1235 182.41,1235 192.41,1225 555,1225 625,1155 JTAG/DEBUG1.10@625,1115 ; U1.47 406.42,691.42 420,705 v1(420,735) ; v1(525,1025) 581.93,1025 601.76,1044.83 601.76,1081.68 JTAG/DEBUG1.10 660,1069.92 660,965 P1.1
  Bottom Layer w10: v1(420,735) 515.5,830.5 515.5,863.13 549,896.63 549,1001 v1(525,1025)
SPI_SS_A: U1.41 U3.1 | length 627.9
  Top Layer w8: U1.41 524.53,729.53 585,790 898.79,790 965.43,856.65 U3.1
TCK/SWDCLK: JTAG/DEBUG1.4 R3.2 U1.46 | length 530.9
  Top Layer w8: U1.46 426.1,686.1 445,705 445,760 395,810 395,1005 425,1035 445,1035 475,1065 JTAG/DEBUG1.4
TMS/SWDIO: JTAG/DEBUG1.2 R2.2 U1.48 | length 483.3
  Top Layer w8: U1.48 385,649.13 385,750 374.75,760.25 374.75,1009.75 425,1060 JTAG/DEBUG1.2
XTAL0: C1.1 U1.10 X1.1 | length 248.4
  Top Layer w8: X1.1@110,390 115.81,395.81 272.02,395.81 292.32,416.1 U1.10
  Top Layer w10: X1.1 X1.1@110,390
pads on no net: JTAG/DEBUG1.6 JTAG/DEBUG1.7 JTAG/DEBUG1.8 K1.5 K1.6 K1.7 K1.9 K1.12 S1.3 S1.4 U1.1 U1.2 U1.3 U1.4 U1.14 U1.15 U1.16 U1.17 U1.20 U1.21 U1.22 U1.23 U1.24 U1.27 U1.28 U1.29 U1.32 U1.35 U1.36 U1.37 U1.38 U1.45 U3.7 U3.9

## Polygon pours and split planes (outlines as drawn)
GND on Bottom Layer "Mechanical 15-No Net" (solid, remove dead copper, pour order 2): 0,0 0,4085 1410,4085 1410,0

## Keep-outs
Keep-Out Layer:
  lines w10: 25,20 1390,20 1390,4060 25,4060 25,20

## Silkscreen, mask and mechanical layers (free items; w line width, h text height)
Top Overlay:
  text "Encoder Fin V1.0" at 600,700 h120
  text "LSI Logic Version" at 645,640 h75
  text "Designed By" at 810,565 h75
  text "Adam Vadala-Roth" at 815,510 h75
  text "RX" at 1220,350 h75
  text "TX" at 1220,255 h75
  text "b" at 750,145 h130
Mechanical 15:
  lines w10: 0,0 0,790 0,4085 1410,4085 1410,0 0,0